# Altium PCB Interface.PcbDoc
Units mm, origin at the board's own origin, x right, y up, seen from the top; angles counter-clockwise.
Board outline 102.81 x 77.5 mm, 2 copper layers (Top Layer, Bottom Layer), stack 0.871 mm thick; 54 components, 47 nets, 231 pads, 116 vias.
Unrouted connection lines stored in the file: 1.
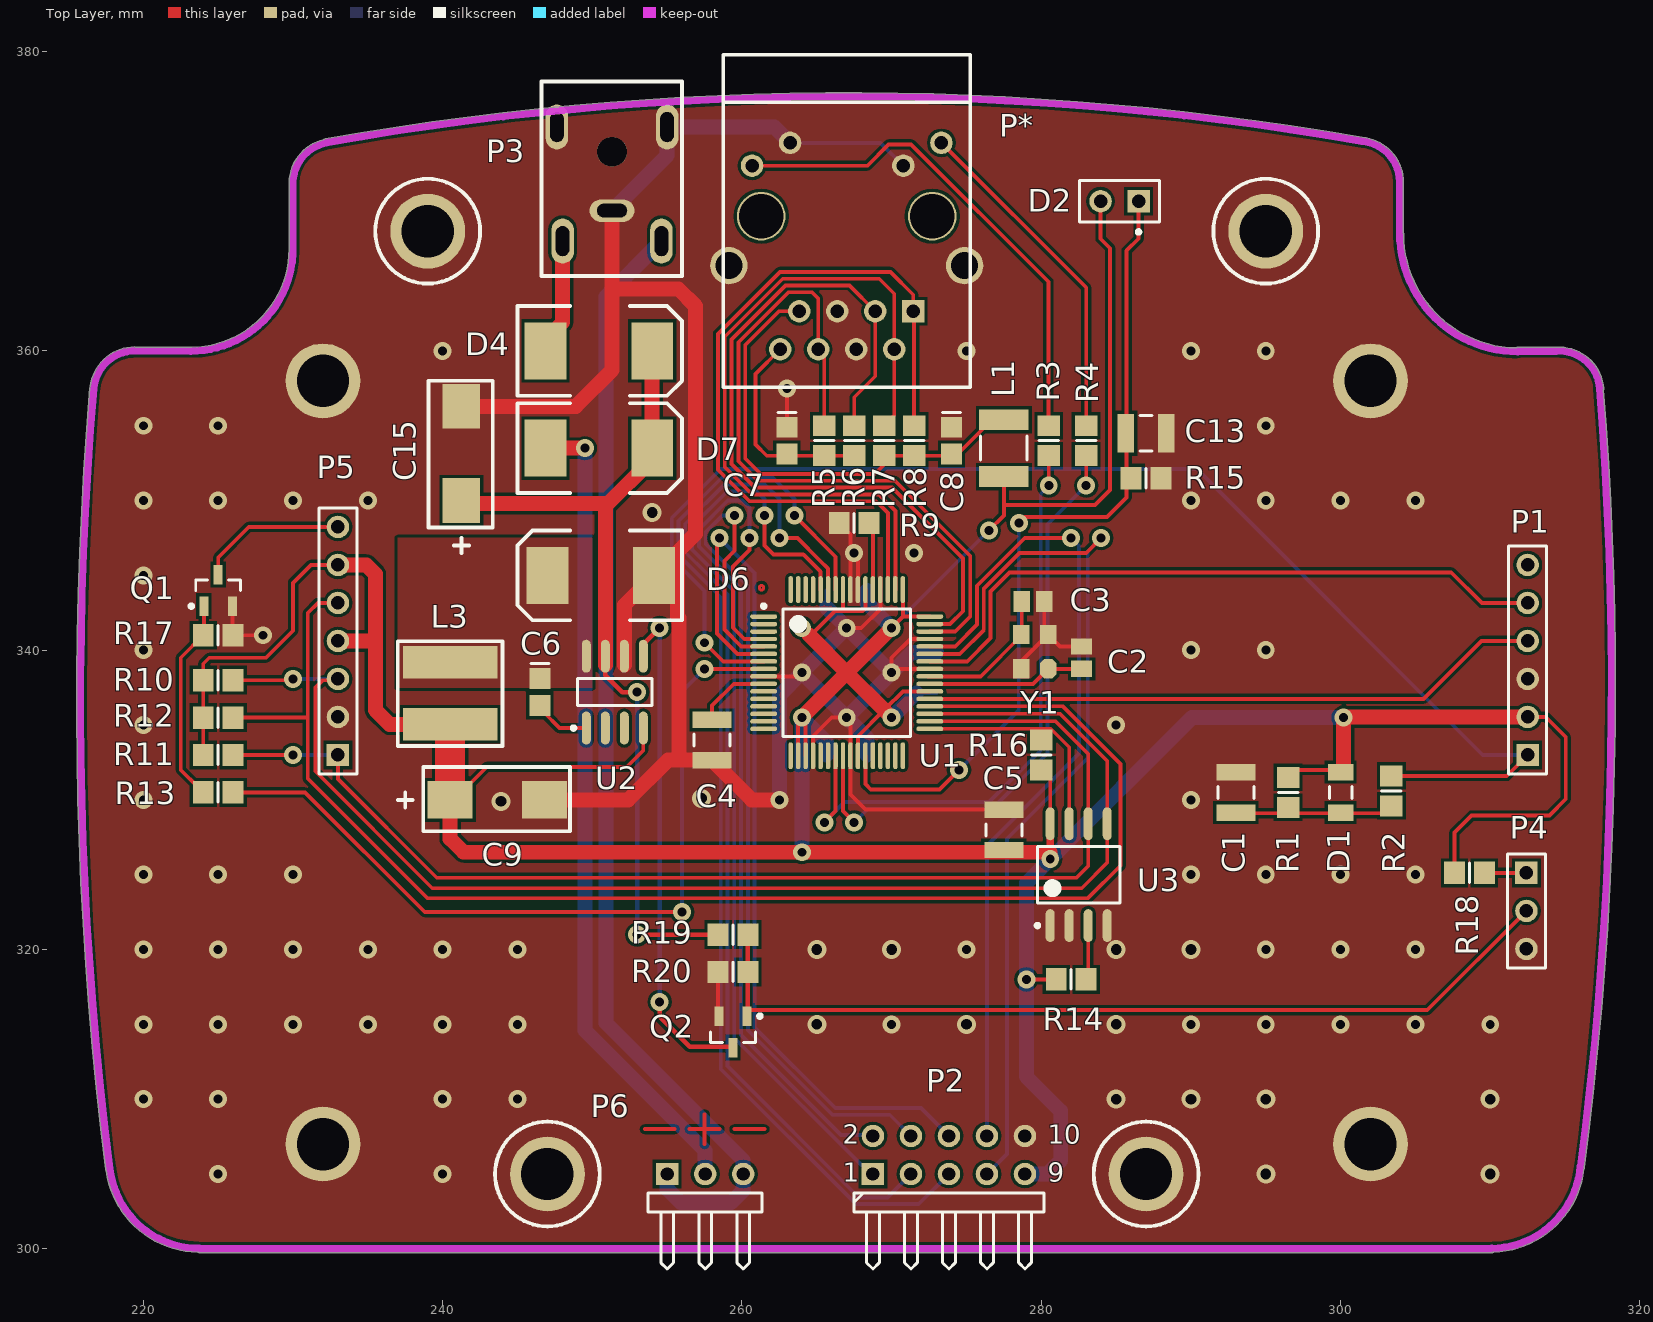
[diagram p0: Top Layer view]
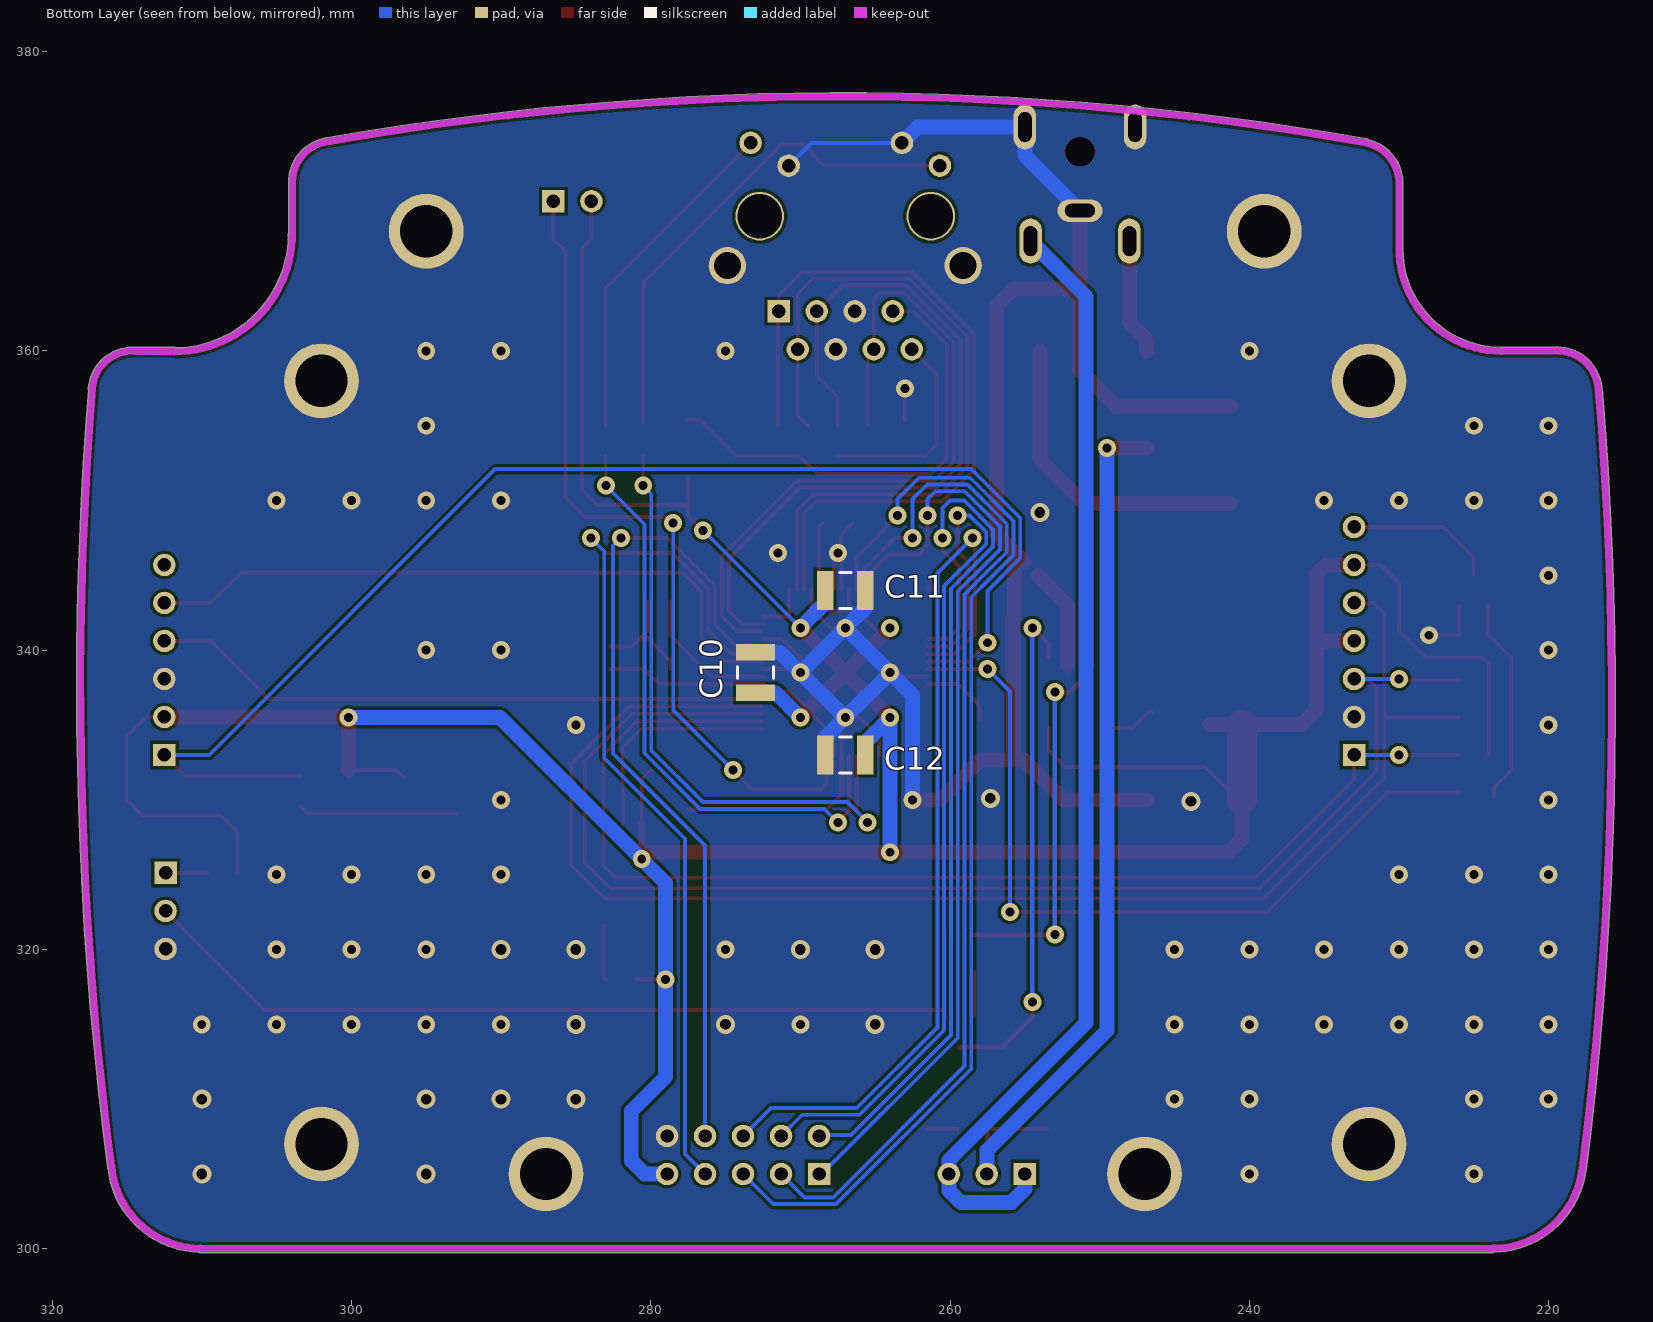
[diagram p1: Bottom Layer view, seen from below]

## Layer stack, top to bottom
Top Layer: signal copper 0.0356
Dielectric: core 0.8, FR-4, Dk 4.8
Bottom Layer: signal copper 0.0356

## Board outline
217.529,305.197 cw(c217.742,305.33) 217.493,305.299 cw(c465.792,336.49) 216.427,357.526 cw(c216.677,357.505) 216.455,357.621 cw(c219.418,357.279) 219.418,360.262 cw(c219.418,360.012) 219.495,360.25 223.164,360.25 cw(c223.164,360) 223.226,360.242 ccw(c223.164,366.82) 229.741,366.82 229.741,371.022 cw(c232.746,371.191) 232.047,374.118 cw(c232.196,373.917) 232.152,374.164 cw(c267.091,177.957) 301.447,374.267 cw(c301.19,371.268) 304.2,371.268 cw(c301.19,371.268) 304.195,371.096 cw(c303.95,371.043) 304.2,371.043 304.2,367.895 cw(c303.954,367.85) 304.205,367.85 ccw(c311.851,367.85) 311.721,360.204 cw(c311.851,359.99) 311.851,360.241 314.416,360.241 cw(c314.617,357.283) 317.575,357.493 cw(c317.325,357.475) 317.575,357.475 cw(c317.325,357.475) 317.565,357.403 cw(c68.107,337.495) 318.358,337.495 cw(c68.107,337.495) 316.297,305.445 cw(c316.049,305.477) 316.26,305.343 cw(c310.03,306.041) 310.221,299.775 cw(c310.112,300) 310.112,299.75 223.75,299.75 cw(c223.75,300) 223.636,299.777 cw(c223.741,306.045)

## Design rules (kind name [scope] priority, off if disabled: settings)
Clearance [All] p1: gap=0.2
PlaneClearance [All] p1: clearance=0.5
PlaneConnect [All] p1: planeconnectstyle=Direct reliefexpansion=0.508 reliefentries=4 reliefconductorwidth=0.254 reliefairgap=0.254
PolygonConnect [All] p1: connectstyle=Direct reliefconductorwidth=0.254 reliefentries=4 polygonreliefangle="90 Angle"
RoutingVias [All] p1: holewidth=0.711 width=1.27 viastyle="Through Hole" minholewidth=0.711 minwidth=1.27 maxholewidth=0.711 maxwidth=1.27
SMDNeckDown [All] p1: percent=200.000
SilkscreenOverComponentPads [All] p1: minsilkscreentomaskgap=0.254
SolderMaskExpansion [All] p1: expansion=0.102
Width [All] p1: maxlimit=2 minlimit=0.254 preferedwidth=0.254 checkconnectedcopper=TRUE
25 further rules are at their usual default settings.

## Components (designator, comment, footprint, x,y, rotation, side; value= is the part's Value field where it differs from the comment)
C1 "Cap" CAPC3225L 293,330.5 r270 top
C2 "Cap" CAPC2012L 282.7,339.5 r90 top
C3 "Cap" CAPC2012L 279.45,343.25 r180 top
C4 "Cap" CAPC3225L 258,334 r270 top
C5 "Cap" CAPC3225L 277.5,328 r90 top
C6 "Cap" CAPC2512L 246.5,337.2 r270 top
C7 "Cap" CAPC2512L 263,354 r270 top
C8 "Cap" CAPC2512L 274,354 r270 top
C9 "Cap Pol1" "Type D" 240,330 r0 top
C10 "Cap" CAPC3225L 273,338.5 r90 bottom
C11 "Cap" CAPC3225L 267,344 r180 bottom
C12 "Cap" CAPC3225L 267,333 r0 bottom
C13 "Cap" CAPC3225L 287,354.5 r0 top
C15 "Cap Pol1" "Type E" 241.25,349.5 r90 top
D1 "Diode" RESC3216L 300,330.5 r90 top
D2 "Photo Sen" PIN2 286.5,370 r180 top
D4 "Diode" "SMC WBODY" 254,360 r180 top
D6 "30BQ100" "SMC WBODY" 247,345 r0 top
D7 "Diode" "SMC WBODY" 254,353.5 r180 top
L1 "Inductor" INDC4532L 277.5,353.5 r90 top
L3 "Inductor" CDRH5D28NP 240.5,339.2 r270 top
P1 "Программатор" HDR1X6 312.5,333 r90 top
P2 "Header 5X2H" HDR2X5H 268.75,305 r0 top
P3 "PWR coneector" "PWR Con" 255,377.5 r270 top
P4 "power control" HDR1X3 312.42,325.12 r270 top
P5 "Display" HDR1X7 233,333 r90 top locked
P6 "Header 3H" HDR1X3H 255,305 r0 top
P* "J00-0063NL" EthernetCON 267,369 r90 top locked
Q1 "BSS123" SOT23_N 225,344 r90 top
Q2 "BSS123" SOT23_N 259.4,314.5 r270 top
R1 "Res2" RESC2012M 296.5,330.5 r90 top
R2 "Res2" RESC2012M 303.4,330.6 r270 top
R3 "Res2" RESC2012M 280.5,354 r90 top
R4 "Res2" RESC2012M 283,354 r90 top
R5 "Res2" RESC2012M 265.5,354 r90 top
R6 "Res2" RESC2012M 267.5,354 r90 top
R7 "Res2" RESC2012M 269.5,354 r90 top
R8 "Res2" RESC2012M 271.5,354 r90 top
R9 "Res2" RESC2012M 267.5,348.5 r0 top
R10 "Res2" RESC2012M 225,338 r0 top
R11 "Res2" RESC2012M 225,333 r0 top
R12 "Res2" RESC2012M 225,335.5 r180 top
R13 "Res2" RESC2012M 225,330.5 r180 top
R14 "Res2" RESC2012M 282,318 r0 top
R15 "Res2" RESC2012M 287,351.5 r180 top
R16 "Res2" RESC2012M 280,333 r90 top
R17 "Res2" RESC2012M 225,341 r0 top
R18 "Res2" RESC2012M 308.61,325.12 r0 top
R19 "Res2" RESC2012M 259.4,321 r0 top
R20 "Res2" RESC2012M 259.4,318.5 r180 top
U1 "PIC18F66J60-I/PT" TQFP-PT64_N 267,338.5 r0 top locked
U2 "LM2674M-3.3" M08A_N 251.5,337.2 r90 top
U3 "24FC1025T-I/SM" SOIJ-SM8_N 282.5,325 r90 top
Y1 "Кварцевый резонатор" "HC 49SM" 280.45,338.75 r90 top

## Footprints (in the part's own frame and the unit in brackets; to place one, negate y for a bottom-side part, rotate by r counter-clockwise, add the part's x,y. Pads: shape width x height; smd on the part's side, far side on the other; paste and mask are expansions set on the pad)
CAPC2012L [mm] "Chip Capacitor, Body 2.0x1.3mm, IPC High Density"
  rect 1.1x1.4 smd: 1(-0.75,0) 2(0.75,0)
  body extent -1.1,-0.72 1.1,0.72, height 1.4
CAPC2512L [mm] "Chip Capacitor, Body 2.54x1.27mm, IPC High Density"
  rect 1.4x1.4 smd: 1(-0.9,0) 2(0.9,0)
  silkscreen extent -1.9,-0.6 -1.9,0.6, body extent -1.45,-0.82 1.45,0.82, height 1.3
CAPC3225L [mm] "Chip Capacitor, Body 3.2x2.5mm, IPC High Density"
  rect 1.1x2.6 smd: 1(-1.35,0) 2(1.35,0)
  silkscreen extent -0.4,-1.2 0.4,1.2, body extent -1.7,-1.35 1.7,1.35, height 1.5
CDRH5D28NP [mm] "POWER INDUCTORS <SMD Type: CDRH Series>"
  rect 2.15x6.3 smd: 1(0,0) 2(4.15,0)
  silkscreen extent -1.4,-3.5 5.6,3.5, body extent -0.82,-2.9 4.97,2.91, height 3
EthernetCON [mm] "Ethernet connector w/two LEDs"
  rect 1.5x1.5 hole 0.9: 1(-6.35,-4.445)
  round 1.5 hole 0.9: 2(-8.89,-3.175) 3(-6.35,-1.905) 4(-8.89,-0.635) 5(-6.35,0.635) 6(-8.89,1.905) 7(-6.35,3.175) 8(-8.89,4.445) 9(4.902,-6.325) 10(3.378,-3.785) 11(4.902,3.785) 12(3.378,6.325)
  round 2.5 hole 1.8: 13(-3.302,-7.874) 14(-3.302,7.874)
  round 3.25 hole 3 unplated: 15(0,-5.715) 16(0,5.715)
  silkscreen extent -11.43,-8.25 10.79,8.25, body extent -11.43,-8.25 11,8.25, height 13.97
"HC 49SM" [mm] "Кварцевый резонатор"
  oct 1.3x1.1 smd: 1(0,0)
  rect 1.3x1.1 smd: 2(2.3,0) 3(2.3,1.8) 4(0,1.8)
  body extent -0.45,-0.38 2.75,2.12, height 1.2
HDR1X3 [mm] "Connector; Header; 3 Position"
  rect 1.5x1.5 hole 0.9: 1(0,0)
  round 1.5 hole 0.9: 2(2.54,0) 3(5.08,0)
  silkscreen extent -1.27,-1.27 6.35,1.27
HDR1X3H [mm] "Connector; Header; 3 Position; Right Angle"
  rect 1.5x1.5 hole 0.9: 1(0,0)
  round 1.5 hole 0.9: 2(2.54,0) 3(5.08,0)
  silkscreen extent -1.27,-6.35 6.35,-1.27
HDR1X6 [mm] "Connector; Header; 6 Position"
  rect 1.5x1.5 hole 0.9: 1(0,0)
  round 1.5 hole 0.9: 2(2.54,0) 3(5.08,0) 4(7.62,0) 5(10.16,0) 6(12.7,0)
  silkscreen extent -1.27,-1.27 13.97,1.27
HDR1X7 [mm] "Connector; Header; 7 Position"
  rect 1.5x1.5 hole 0.9: 1(0,0)
  round 1.5 hole 0.9: 2(2.54,0) 3(5.08,0) 4(7.62,0) 5(10.16,0) 6(12.7,0) 7(15.24,0)
  silkscreen extent -1.27,-1.27 16.51,1.27
HDR2X5H [mm] "Connector; Header; 5x2 Position; Right Angle"
  rect 1.5x1.5 hole 0.9: 1(0,0)
  round 1.5 hole 0.9: 2(0,2.54) 3(2.54,0) 4(2.54,2.54) 5(5.08,0) 6(5.08,2.54) 7(7.62,0) 8(7.62,2.54) 9(10.16,0) 10(10.16,2.54)
  silkscreen extent -1.27,-6.35 11.43,-1.27
INDC4532L [mm] "Chip Inductor, Body 4.5x3.2mm, IPC High Density"
  rect 1.4x3.3 smd: 1(-1.9,0) 2(1.9,0)
  silkscreen extent -0.8,-1.55 0.8,1.55, body extent -2.4,-1.7 2.4,1.7, height 0.55
M08A_N [mm] "SOIC, 8-Leads, Body 4.9x3.9mm, Pitch 1.27mm, IPC Medium Density"
  oval 2.2x0.6 smd: 1(-2.4,1.905) 2(-2.4,0.635) 3(-2.4,-0.635) 4(-2.4,-1.905) 5(2.4,-1.905) 6(2.4,-0.635) 7(2.4,0.635) 8(2.4,1.905)
  silkscreen extent -2.52,-2.5 0.9,2.88, body extent -2,-2.5 2,2.5, height 1.75
PIN2 [mm] "Photosensitive Diode; 2 Leads"
  rect 1.5x1.5 hole 0.9: 1(0,0)
  round 1.5 hole 0.9: 2(2.54,0)
  silkscreen extent -1.4,-1.4 3.94,2.17
"PWR Con" [mm] "Connector"
  oval 1.5x3 hole 0.9 slot 2 at 90 deg: 1(8.128,-3.683)
  oval 3x1.5 hole 0.9 slot 2 at 0 deg: 2(10.16,-0.381) 3(10.16,-6.985) 4_1(2.54,-7.366) 5(2.54,0)
  round 2 hole 2: 4(4.191,-3.683)
  silkscreen extent -0.5,-8.4 12.5,1, body extent 0,-7.37 12,0, height 10
RESC2012M [mm] "Chip Resistor, Body 2.0x1.2mm, IPC Low Density"
  rect 1.4x1.5 smd: 1(-1,0) 2(1,0)
  silkscreen extent 0,-0.65 0,0.65, body extent -1.07,-0.7 1.07,0.7, height 0.7
RESC3216L [mm] "Chip Resistor, Body 3.1x1.6mm, IPC High Density"
  rect 1.1x1.7 smd: 1(-1.35,0) 2(1.35,0)
  silkscreen extent -0.4,-0.75 0.4,0.75, body extent -1.68,-0.87 1.68,0.87, height 2.54
"SMC WBODY" [mil]
  rect 110x150 smd: 1(280.51,0) 2(0,0)
  silkscreen extent -79,-118 354,118, body extent 0,-118 276,118, height 84
SOIJ-SM8_N [mm] "SOP, 8-Leads, Body 5.2x5.2mm, Pitch 1.27mm, IPC Medium Density"
  oval 2.2x0.6 smd: 1(-3.4,1.905) 2(-3.4,0.635) 3(-3.4,-0.635) 4(-3.4,-1.905) 5(3.4,-1.905) 6(3.4,-0.635) 7(3.4,0.635) 8(3.4,1.905)
  silkscreen extent -3.52,-2.75 1.9,2.88, body extent -2.73,-2.75 2.73,2.75, height 2.04
SOT23_N [mm] "SOT23, 3-Leads, Body 2.9x1.3mm, Pitch 0.95mm, Lead Span 2.3mm, IPC Medium Density"
  rect 1.3x0.6 smd: 1(-1.05,0.95) 2(-1.05,-0.95) 3(1.05,0)
  silkscreen extent -1.17,-1.5 0.7,1.92, body extent -0.7,-1.5 0.7,1.5, height 1.1
TQFP-PT64_N [mm] "Thin QFP, 64-Leads, Body 10x10mm, Pitch 0.5mm, IPC Medium Density"
  oval 1.8x0.3 smd: 1(-5.55,3.75) 2(-5.55,3.25) 3(-5.55,2.75) 4(-5.55,2.25) 5(-5.55,1.75) 6(-5.55,1.25) 7(-5.55,0.75) 8(-5.55,0.25) 9(-5.55,-0.25) 10(-5.55,-0.75) 11(-5.55,-1.25) 12(-5.55,-1.75) 13(-5.55,-2.25) 14(-5.55,-2.75) 15(-5.55,-3.25) 16(-5.55,-3.75) 33(5.55,-3.75) 34(5.55,-3.25) 35(5.55,-2.75) 36(5.55,-2.25) 37(5.55,-1.75) 38(5.55,-1.25) 39(5.55,-0.75) 40(5.55,-0.25) 41(5.55,0.25) 42(5.55,0.75) 43(5.55,1.25) 44(5.55,1.75) 45(5.55,2.25) 46(5.55,2.75) 47(5.55,3.25) 48(5.55,3.75)
  oval 0.3x1.8 smd: 17(-3.75,-5.55) 18(-3.25,-5.55) 19(-2.75,-5.55) 20(-2.25,-5.55) 21(-1.75,-5.55) 22(-1.25,-5.55) 23(-0.75,-5.55) 24(-0.25,-5.55) 25(0.25,-5.55) 26(0.75,-5.55) 27(1.25,-5.55) 28(1.75,-5.55) 29(2.25,-5.55) 30(2.75,-5.55) 31(3.25,-5.55) 32(3.75,-5.55) 49(3.75,5.55) 50(3.25,5.55) 51(2.75,5.55) 52(2.25,5.55) 53(1.75,5.55) 54(1.25,5.55) 55(0.75,5.55) 56(0.25,5.55) 57(-0.25,5.55) 58(-0.75,5.55) 59(-1.25,5.55) 60(-1.75,5.55) 61(-2.25,5.55) 62(-2.75,5.55) 63(-3.25,5.55) 64(-3.75,5.55)
  silkscreen extent -5.67,-4.25 4.25,4.57, body extent -5,-5 5,5, height 1.2
"Type D" [mm] "Tantal capacitor Type D"
  rect 3x2.5 smd: 1(0.5,0) 2(6.8,0)
  silkscreen extent -3,-2.1 8.5,2.2, body extent 0,-2.15 7.3,2.15, height 2.8
"Type E" [mm] "Tantal capacitor"
  rect 3x2.5 smd: 1(0.5,0) 2(6.8,0)
  silkscreen extent -3,-2.1 8.5,2.2, body extent 0,-2.15 7.3,2.15, height 4

## Part data
C1 C2 C3 C4 C5 C6 C7 C8 C10 C11 C12 C13: "Capacitor"
C9 C15: "Polarized Capacitor (Radial)"
D1 D4 D7: "Default Diode"
D2: "Photosensitive Diode"
D6: "Schottky Rectifier"
P1: library part "Header 6", "Header, 6-Pin"
P2: "Header, 5-Pin, Dual row, Right Angle"
P4: library part "Header 3", "ON/off(1/0)"
P5: library part "Header 7", "Header, 7-Pin"
P6: "Header, 3-Pin, Right Angle"
Q1 Q2: "N-channel Enhancement Mode Vertical D-MOSFET"
R1 R2 R3 R4 R5 R6 R7 R8 R9 R10 R11 R12 R13 R14 R15 R16 R17 R18 R19 R20: "Resistor"
U1: "High Performance, 1-Mbit Flash Microcontroller with Ethernet, 64K Flash, 64-Pin TQFP, Industrial Temperature Range"
U2: "SIMPLE SWITCHER; Power Converter High Efficiency 500mA Step-Down Voltage Regulator"
U3: "1 Mbit, 1MHz, 2.5V, I2C Serial EEPROM, 8-Pin SOIC 208mil, Industrial Temperature, Tape and Reel"
Y1: library part XTAL

## Free pads (board coordinates)
  round 5 hole 3.5: 0(232,307) 0(232,358) 0(239,368) 0(247,305) 0(287,305) 0(295,368) 0(302,307) 0(302,358)

## Via types
v1: diameter 1.2, hole 0.6, Top Layer to Bottom Layer, 100 vias
v2: diameter 1.27, hole 0.711, Top Layer to Bottom Layer, 16 vias

## Nets (pads, with @x,y where several pads share a name; then routed paths per layer and width w, separated by ;. In a path a pad name is that pad's centre, name@x,y a point inside that pad or via, vN(x,y) a via of type N, cw(c..) or ccw(c..) an arc to the next point about the centre after c; other vN are vias at no path point)
GND: C1.1 C2.2 C3.1 C4.2 C5.2 C7.1 C8.1 C9.2 C10.2 C11.2 C12.2 C13.2 C15.2 D6.1 P1.3 P2.10 P3.1 P3.4 P3.4_1 P3.5 P4.3 P5.2 P*.4 P*.5 P*.10 P*.11 P*.13 P*.14 pad.0 Q1.2 Q2.2 R9.1 R15.1 R17.2 R20.2 U1.9 U1.20 U1.25 U1.41 U1.45 U1.52 U1.55 U1.56 U2.6 U3.1 U3.2 U3.4 Y1.2 Y1.4 | length 203.3
  Top Layer w0.254: Q1.2 225.95,341.05 R17.2 v1(228,341) ; R20.2 258.4,315.6 Q2.2 ; U1.9 263.75,338.25 v1(264,338.5) ; C7.1@263,355.35 v1(263,357.5) ; U1.20 264.75,334.25 266,335.5 v1(267,335.5) 267.25,335.25 U1.25 267.25,330.35 268.25,329.35 273.15,329.35 C5.2 ; R9.1 267.25,347.75 U1.56 ; v1@267.25,341.475 267.975,341.475 269.25,342.75 U1.52 ; v1(267.5,346.5) 267.75,346.25 U1.55 ; P*.4@267.635,359.985 P*.4 ; U1.41 270.25,338.75 v1(270,338.5) 270,339.5 271.25,340.75 U1.45 ; Y1.4 278.65,339.25 Y1.2 ; C3.1 280.2,341.3 Y1.2 ; C2.2 281.25,340.25 Y1.2
  Top Layer w1: C15.2 248.9,356.3 251.317,358.717 251.317,364.15 ; C9.2 252.4,330 255,332.6 ; 251.317,365.817 251.317,364.15 ; P3.1 251.317,364.15 ; U2.6@252.135,339 252.135,343.01 D6.1 ; 255.05,332.65 255.699,332.65 ; D6.1@255.05,345.925 255.699,346.574 ; v1(262.5,330) 260.65,330 C4.2 255.699,332.65 ; 251.317,364.15 255.75,364.15 256.9,363 256.9,347.775 255.699,346.574 ; 255.699,332.65 255.8,332.751 255.8,342.139 255.699,342.24 255.699,346.574
  Bottom Layer w0.254: P*.11 269.261,373.902 P*.10 ; C11.2@265.65,342.85 C11.2
  Bottom Layer w1: P3.1 255,373.055 P3.5 262.158,374.96 P*.11 ; v1(262.5,330) 262.5,337 v1(264,338.5) ; C11.2@265.65,342.85 v1(267,341.5) ; C12.2 268.35,334.15 v1(267,335.5) ; C10.2 271.35,339.85 v1(270,338.5) ; v1(264,338.5) v1(267,341.5) ; v1(264,338.5) v1(267,335.5) ; v1(267,335.5) v1(270,338.5) ; v1(267,341.5) v1(270,338.5)
  other v1: 225,305 240,305 220,310 225,310 240,310 245,310 220,315 225,315 230,315 235,315 240,315 245,315 270,315 290,315 295,315 300,315 305,315 310,315 220,320 225,320 230,320 235,320 240,320 245,320 275,320 295,320 300,320 305,320 220,325 225,325 230,325 290,325 295,325 300,325 305,325 220,330 290,330 220,335 285,335 220,340 290,340 295,340 220,345 271.5,346.5 220,350 225,350 230,350 235,350 290,350 295,350 300,350 305,350 220,355 225,355 295,355 240,360 275,360 290,360 295,360
  other v2: 295,305 310,305 285,310 290,310 295,310 310,310 265,315 275,315 285,315 265,320 270,320 285,320 290,320 243.9,329.9 257.3,330.1 254,349.2
NetC1_2: C1.2 D1.1 R1.1 R2.2 | length 10.6
  Top Layer w0.254: C1.2@293,329.1 297.4,329.1 302.9,329.1 R2.2
NetC2_1: C2.1 U1.39 Y1.1 | length 10.7
  Top Layer w0.254: U1.39@272.45,337.75 279.45,337.75 Y1.1 C2.1
NetC3_2: C3.2 U1.40 Y1.3 | length 9.6
  Top Layer w0.254: U1.40@272.45,338.25 275.95,338.25 Y1.3@278.7,341 ; Y1.3 278.7,341.1 C3.2
NetC4_1: C4.1 U1.10 | length 5
  Top Layer w0.254: C4.1 258,336.3 259.45,337.75 U1.10
NetC6_1: C6.1 D6.2 L3.1 U2.8
NetC6_2: C6.2 U2.1 | length 3.5
  Top Layer w0.254: C6.2@246.5,335.85 246.75,335.85 247.8,334.8 U2.1
NetC7_2: C7.2 P*.8 R5.1 R6.1 | length 14
  Top Layer w0.254: P*.8 260.897,358.452 260.897,353.753 261.65,353 R6.1
NetC8_2: C8.2 L1.2 P*.7 R7.1 R8.1 | length 31.3
  Top Layer w0.254: P*.7 262.478,362.65 260.216,360.388 260.216,352.812 261.254,351.774 268.874,351.774 270.1,353 C8.2@274.313,353 ; C8.2@274.313,353.013 276.7,355.4 L1.2
NetC13_1: C13.1 D2.1 R15.2 U1.27 | length 55
  Top Layer w0.254: U1.27 268.25,331.05 268.6,330.7 273.2,330.7 v1(274.5,332) ; v1(278.5,348.5) 278.9,348.9 284.4,348.9 285.7,350.2 285.7,366.7 286.5,367.5 D2.1
  Bottom Layer w0.254: v1(274.5,332) 278.5,336 v1(278.5,348.5)
NetC15_1: C15.1 D4.2 D7.2 R19.1 U2.7 | length 57.4
  Top Layer w0.3: U2.7 250.865,338.335 252,337.2 v1(253,337.2) ; v1(253,321) R19.1
  Top Layer w1: C15.1@241.25,349.8 250.865,349.8 ; U2.7@250.865,339 250.865,349.615 254,352.75 D4.2
  Bottom Layer w0.3: v1(253,321) v1(253,337.2)
NetD4_1: D4.1 P3.3 | length 7.8
  Top Layer w1: D4.1 246.875,360.775 248.015,361.915 P3.3
NetD7_1: D7.1 P6.2 | length 54.5
  Top Layer w1: D7.1 v1(249.5,353.5)
  Bottom Layer w1: v1(249.5,353.5) 249.5,314.6 257.54,306.56 P6.2
NetP1_1: P1.1 R2.1 U1.7 | length 90.6
  Top Layer w0.254: v1(257.499,340.499) 257.5,340.2 257.8,340.2 258.75,339.25 U1.7 ; R2.1@304,331.6 R2.1 303.7,331.6 311.1,331.6 P1.1
  Bottom Layer w0.254: v1(257.499,340.499) 257.5,343.965 255.303,346.162 255.303,348.824 258.579,352.1 276.44,352.1 290.4,352.1 309.5,333 P1.1
NetP1_4: P1.4 U1.37 | length 41.6
  Top Layer w0.254: U1.37 303.31,336.75 303.955,336.75 304.69,336.75 305.55,336.75 309.42,340.62 P1.4
NetP1_5: P1.5 U1.42 | length 45.1
  Top Layer w0.254: U1.42 275.05,339.25 276.616,340.816 276.616,343.932 277.884,345.2 307.4,345.2 309.44,343.16 P1.5
NetP2_1: P2.1 U1.60 | length 63.2
  Top Layer w0.254: v1(261.5,349) 261.5,347 262.1,346.4 264.1,346.4 265.25,345.25 U1.60
  Bottom Layer w0.254: v1(261.5,349) 261.5,350.1 260.98,350.62 259.025,350.62 256.665,348.26 256.665,346.74 257.74,345.665 259.484,343.921 259.484,314.096 268.58,305 P2.1
NetP2_2: P2.2 U1.4 | length 62
  Top Layer w0.254: v1(260.5,347.5) 260.5,347 260.5,346.7 259.4,345.6 259.4,341.5 260.15,340.75 U1.4
  Bottom Layer w0.254: v1(260.5,347.5) 260.5,349.5 260,350 259.047,350 257.119,348.072 257.119,346.928 257.928,346.119 259.938,344.109 259.938,314.42 259.938,314.284 266.622,307.6 P2.2@269,307.6
NetP2_3: P2.3 U1.59 | length 69.8
  Top Layer w0.254: v1(262.5,347.5) 263.7,347.5 265.2,346 265.75,345.45 U1.59
  Bottom Layer w0.254: v1(262.5,347.5) 262.5,350.1 261.526,351.074 258.837,351.074 256.211,348.448 256.211,346.552 257.552,345.211 259.03,343.733 259.03,313.908 259.03,312.212 267.802,303.44 269.73,303.44 P2.3
NetP2_4: P2.4 U1.5 | length 61.7
  Top Layer w0.254: v1(259.5,349) 259.5,346.642 258.826,345.968 258.826,341.374 259.95,340.25 U1.5
  Bottom Layer w0.254: v1(259.5,349) 258.689,349 257.573,347.884 257.573,347.116 258.116,346.573 260.392,344.297 260.392,314.608 266.04,308.96 269.87,308.96 P2.4
NetP2_5: P2.5 U1.58 | length 75.1
  Top Layer w0.254: U1.58 266.25,346.25 v1(263.5,349) ; v1(263.5,349) 263.5,348.6 v1(263.5,349)
  Bottom Layer w0.254: v1(263.5,349) 263.5,350.1 262.072,351.528 261.657,351.528 261.243,351.528 258.649,351.528 255.757,348.636 255.757,346.364 257.364,344.757 258.576,343.545 258.576,312.024 267.614,302.986 271.816,302.986 P2.5
NetP2_6: P2.6 U1.6 | length 59.8
  Top Layer w0.254: v1(258.5,347.5) 258.332,347.332 258.332,341.121 259.703,339.75 U1.6
  Bottom Layer w0.254: v1(258.5,347.5) 260.846,345.154 260.846,314.796 266.228,309.414 271.956,309.414 P2.6
NetP2_7: P2.7 U1.43 | length 61.9
  Top Layer w0.254: U1.43 274.55,339.75 276.162,341.362 276.162,344.12 278.542,346.5 283,346.5 v1(284,347.5)
  Bottom Layer w0.254: P2.7 277.7,306.33 277.7,327.4 283.1,332.8 283.1,346.6 v1(284,347.5)
NetP2_8: P2.8 U1.44 | length 56.7
  Top Layer w0.254: U1.44 274.25,340.25 275.708,341.708 275.708,344.308 278.899,347.499 v1(282,347.499)
  Bottom Layer w0.254: P2.8 276.37,326.955 282.519,333.104 282.519,346.981 v1(282,347.499)
NetP3_2: P3.2 P6.1 P6.3 | length 75.6
  Bottom Layer w1: P3.2 250.9,363.621 250.9,315.1 260.08,305.92 260.08,303.9 259.28,303.1 255.9,303.1 255,304 P6.1
NetP4_1: P4.1 R18.2 | length 2.8
  Top Layer w0.254: R18.2 P4.1
NetP4_2: P4.2 Q2.1 R19.2 R20.1 | length 65.4
  Top Layer w0.254: Q2.1 260.35,320.95 R19.2 260.4,315.95 284.175,315.95 305.79,315.95 P4.2
  Top Layer w0.3: Q2.1 Q2.1@260.4,315.6
NetP5_1: P5.1 R11.2 U1.34 U3.6 | length 80.8
  Top Layer w0.254: R11.2 v1(230,333) ; P5.1 233,331.4 239.6,324.8 282.358,324.8 283.135,325.577 U3.6 283.135,333.065 280.95,335.25 U1.34
  Bottom Layer w0.254: v1(230,333) P5.1
NetP5_3: P5.3 R10.2 U1.35 U3.5 | length 91.2
  Top Layer w0.254: R10.2 v1@230,338 ; P5.3@233.08,338 232,338 231.5,337.5 231.5,331.908 239.308,324.1 282.7,324.1 284.405,325.805 284.405,332.595 281.25,335.75 U1.35
  Bottom Layer w0.254: v1(230,338.08) P5.3
NetP5_5: P5.5 R12.1 U1.36 | length 98
  Top Layer w0.254: R12.1 230.928,335.5 ; P5.5 231.66,343.16 230.981,342.481 230.981,331.419 238.968,323.432 283.132,323.432 285.3,325.6 285.3,332.4 281.45,336.25 U1.36
NetP5_7: P5.7 Q1.3 | length 10
  Top Layer w0.254: Q1.3 225,346.2 227.04,348.24 P5.7
NetP*_9: P*.9 R4.2 | length 22.9
  Top Layer w0.254: P*.9 283,364.227 R4.2
NetP*_12: P*.12 R3.2 | length 33.6
  Top Layer w0.254: P*.12 268.378,372.378 269.8,373.8 271.3,373.8 280.475,364.625 R3.2@280.475,355.2
NetQ1_1: Q1.1 R13.2 R17.1 | length 13.9
  Top Layer w0.254: R13.2@223.65,330.15 223.65,330.85 222.5,332 222.5,339.5 224.05,341.05 Q1.1
NetQ2_3: Q2.3 U2.5 | length 34.1
  Top Layer w0.3: U2.5 253.405,340.405 v1(254.5,341.5) ; v1(254.5,316.5) 254.5,315.5 256.5,313.5 259.25,313.5 259.35,313.4 Q2.3
  Bottom Layer w0.3: v1(254.5,316.5) v1(254.5,341.5)
NetR3_1: R3.1 U1.23 | length 41.1
  Top Layer w0.254: v1(265.5,328.5) 266.25,329.25 U1.23 ; v1(280.5,351) R3.1
  Bottom Layer w0.254: v1(265.5,328.5) 266.854,329.854 276.512,329.854 279.96,333.302 279.96,350.46 v1(280.5,351)
NetR4_1: R4.1 U1.24 | length 40.5
  Top Layer w0.254: U1.24 266.75,329.25 v1(267.5,328.5) ; v1(283,351) R4.1
  Bottom Layer w0.254: v1(267.5,328.5) 268.4,329.4 276.7,329.4 280.414,333.114 280.414,348.414 v1(283,351)
NetR13_1: R13.1 U1.8 | length 54.1
  Top Layer w0.254: R13.1 230.8,330.5 238.8,322.5 v1(256,322.5) ; v1(257.5,338.75) U1.8
  Bottom Layer w0.254: v1(256,322.5) 256,337.25 v1(257.5,338.75)
NetR14_2: R14.2 U3.3 | length 3.7
  Top Layer w0.254: R14.2 283.135,318.135 U3.3
NetR16_2: R16.2 U1.33 U3.7 | length 14.9
  Top Layer w0.254: U1.33 280.637,334.75 281.865,333.522 U3.7
NetU1_11: U1.11
RBIAS: R9.2 U1.53 | length 4.6
  Top Layer w0.254: R9.2 268.75,348.25 U1.53
TP_IN_N: P*.6 R5.2 U1.46 | length 48.8
  Top Layer w0.254: R5.2 265.5,359.705 P*.6 265.095,363.505 264.682,363.918 263.104,363.918 259.762,360.576 259.762,352.624 261.066,351.32 270.222,351.32 275.254,346.288 275.254,342.254 274.25,341.25 U1.46
TP_IN_P: P*.3 R6.2 U1.47 | length 52.6
  Top Layer w0.254: R6.2 267.5,356.9 268.905,358.305 P*.3 267.183,364.372 262.916,364.372 259.308,360.764 259.308,352.436 260.878,350.866 270.034,350.866 274.76,346.14 274.76,342.607 273.903,341.75 U1.47@272.45,341.75
TPOUT1_N: P*.2 R7.2 U1.50 | length 49
  Top Layer w0.254: R7.2 270.175,355.675 P*.2 270.175,363.825 269.174,364.826 262.728,364.826 258.854,360.952 258.854,352.248 260.69,350.412 269.142,350.412 270.25,349.304 U1.50
TPOUT1_P: P*.1 R8.2 U1.51 | length 50.9
  Top Layer w0.254: U1.51 269.75,349.162 268.954,349.958 260.502,349.958 258.4,352.06 258.4,361.14 262.54,365.28 269.92,365.28 271.445,363.755 P*.1 271.5,362.595 R8.2
VCC: C5.1 C9.1 C10.1 C11.1 C12.1 D1.2 D2.2 L1.1 L3.2 P1.2 P2.9 P5.4 P5.6 R1.2 R10.1 R11.1 R12.2 R14.1 R16.1 R18.1 U1.18 U1.19 U1.26 U1.38 U1.48 U1.49 U1.54 U1.57 U2.4 U3.8 | length 303.4
  Top Layer w0.2: 261.454,344.175 ccw(c261.304,344.175) 261.454,344.175
  Top Layer w0.254: R11.1 224,339.1 224.4,339.5 228.2,339.5 230,341.3 230,344.5 231.2,345.7 P5.6 ; 235.48,340.62 235.5,340.6 ; C9.1@240.5,329.75 242.95,332.2 252.3,332.2 253.405,333.305 U2.4 ; U1.18 263.75,335.25 v1(264,335.5) 264.25,335.25 U1.19 ; v1(264,341.5) 264.489,341.011 264.611,341.011 266.225,342.625 266.75,342.625 ; U1.57 266.75,342.625 ; U1.26 267.75,334.25 269.5,336 v1(270,335.5) 269.6,335.9 269.6,336.1 270.75,337.25 U1.38 ; U1.54 268.25,342.8 268.075,342.625 266.75,342.625 ; v1@269.525,341.5 v1@269.8,341.5 ; v1@269.8,341.3 v1@269.8,341.5 ; U1.49 270.75,342.25 ; U1.48 270.75,342.25 ; v1(276.493,347.993) 277.5,349 277.5,349.699 ; L1.1 277.5,349.699 ; v1(279,318) R14.1 ; R16.1 280.595,331.405 U3.8 ; D2.2 283.96,367.5 284.6,366.86 284.6,350.7 283.599,349.699 277.5,349.699 ; R1.2 297,332 D1.2@300.6,332 ; R18.1 307.61,327.81 308.75,328.95 313.95,328.95 315.05,330.05 315.05,334.2 313.71,335.54 P1.2 ; v1@269.8,341.5 v1(270,341.5) 270.75,342.25
  Top Layer w0.5: U3.8 280.598,326.477 v1(280.599,326.034)
  Top Layer w1: P5.4 235.48,340.62 ; P5.6 234.9,345.7 235.5,345.1 235.5,336 236.45,335.05 L3.2@242.65,335.05 ; C9.1@240.5,329.75 240.5,327.4 241.4,326.5 v1(264,326.5) 280.576,326.5 280.598,326.477 280.6,326.476 v1(280.599,326.034) ; v1(264,335.5) 267,338.5 ; 264.489,341.011 267,338.5 ; v1@269.6,335.9 269.5,336 267,338.5 ; v1@269.8,341.3 267,338.5 ; D1.2@300.2,332 v1(300.2,335.5) 300.2,335.54 P1.2
  Top Layer w2: C9.1 L3.2
  Bottom Layer w0.254: v1(270,341.5) v1(276.493,347.993) ; 271.65,337.15 C10.1
  Bottom Layer w1: v1(264,326.5) v1(264,335.5) 265.65,333.85 C12.1 ; C11.1 268.35,343.15 v1(270,341.5) ; v1(270,335.5) 271.65,337.15 ; P2.9 280.4,305 281.3,305.9 281.3,309.2 279,311.5 v1(279,318) 279,324.435 v1(280.599,326.034) 290.065,335.5 v1(300.2,335.5)
pads on no net: P1.6 P*.15 P*.16 U1.1 U1.2 U1.3 U1.12 U1.13 U1.14 U1.15 U1.16 U1.17 U1.21 U1.22 U1.28 U1.29 U1.30 U1.31 U1.32 U1.61 U1.62 U1.63 U1.64 U2.2 U2.3
copper on no net: | length 8
  Top Layer w0.25: 253.5,308 255.5,308 ; 256.5,308 258.5,308 ; 257.5,307 257.5,309 ; 259.5,308 261.5,308

## Polygon pours and split planes (outlines as drawn)
NetC6_1 on Top Layer "Top Layer-No Net" (solid, remove dead copper, pour order 1000): 250,337.5 250,347.5 237,347.5 237,337.5
GND on Top Layer "Top Layer-No Net 1" (solid, remove dead copper, pour order 1002): 217.489,305.172 cw(c217.702,305.305) 217.453,305.273 cw(c465.752,336.465) 216.387,357.499 cw(c216.637,357.478) 216.415,357.594 cw(c219.378,357.254) 219.378,360.237 cw(c219.378,359.987) 219.455,360.225 223.124,360.225 cw(c223.124,359.975) 223.186,360.217 ccw(c223.124,366.794) 229.701,366.794 229.701,370.997 cw(c232.706,371.166) 232.007,374.093 cw(c232.157,373.892) 232.113,374.139 cw(c267.051,177.932) 301.407,374.241 cw(c301.15,371.243) 304.16,371.243 cw(c301.15,371.243) 304.155,371.071 cw(c303.91,371.018) 304.16,371.018 304.16,367.87 cw(c303.914,367.825) 304.165,367.825 ccw(c311.811,367.825) 311.681,360.179 cw(c311.811,359.965) 311.811,360.215 314.376,360.215 cw(c314.577,357.257) 317.535,357.467 cw(c317.285,357.45) 317.535,357.45 cw(c317.285,357.45) 317.525,357.377 cw(c68.067,337.469) 318.318,337.469 cw(c68.067,337.469) 316.257,305.421 cw(c316.009,305.453) 316.22,305.318 cw(c309.99,306.015) 310.181,299.749 cw(c310.072,299.975) 310.072,299.724 223.71,299.724 cw(c223.71,299.975) 223.596,299.752 cw(c223.701,306.02)
GND on Bottom Layer "Bottom Layer-No Net" (solid, remove dead copper, pour order 1003): 217.496,305.242 cw(c217.709,305.374) 217.46,305.343 cw(c465.759,336.535) 216.394,357.569 cw(c216.644,357.548) 216.422,357.664 cw(c219.385,357.324) 219.385,360.307 cw(c219.385,360.057) 219.462,360.295 223.13,360.295 cw(c223.13,360.045) 223.193,360.287 ccw(c223.13,366.864) 229.708,366.864 229.708,371.067 cw(c232.713,371.235) 232.014,374.163 cw(c232.164,373.962) 232.12,374.209 cw(c267.058,178.002) 301.414,374.311 cw(c301.157,371.313) 304.167,371.313 cw(c301.157,371.313) 304.162,371.141 cw(c303.917,371.088) 304.167,371.088 304.167,367.94 cw(c303.921,367.895) 304.171,367.895 ccw(c311.818,367.895) 311.688,360.249 cw(c311.818,360.035) 311.818,360.285 314.383,360.285 cw(c314.584,357.327) 317.542,357.537 cw(c317.292,357.52) 317.542,357.52 cw(c317.292,357.52) 317.532,357.447 cw(c68.074,337.539) 318.325,337.539 cw(c68.074,337.539) 316.264,305.491 cw(c316.016,305.523) 316.227,305.388 cw(c309.997,306.085) 310.188,299.819 cw(c310.078,300.045) 310.078,299.794 223.717,299.794 cw(c223.717,300.045) 223.603,299.822 cw(c223.708,306.089)

## Keep-outs
Keep-Out Layer:
  lines w0.5: 216.677,357.505 ccw(c465.792,336.49) 217.742,305.33 ; 216.695,357.502 cw(c219.418,357.279) 219.418,360.012 ; 217.764,305.333 ccw(c223.741,306.045) 223.75,300.026 ; 219.418,360 223.164,360 ; 223.164,359.992 ccw(c223.164,366.82) 229.991,366.82 229.991,371.03 cw(c232.746,371.191) 232.215,373.898 ; 223.75,300 233.025,300 ; 232.196,373.917 cw(c267.091,177.957) 301.415,374.018 cw(c301.19,371.268) 303.94,371.043 ; 233,300 301,300 ; 300.975,300 310.112,300 ; 303.95,367.85 303.95,371.043 ; 303.954,367.85 ccw(c311.851,367.85) 311.851,359.953 ; 310.112,300.023 ccw(c310.03,306.041) 316.026,305.522 ; 311.851,359.99 314.425,359.99 cw(c314.617,357.283) 317.325,357.475 ; 316.049,305.477 ccw(c68.107,337.495) 317.308,357.475

## Silkscreen, mask and mechanical layers (free items; w line width, h text height)
Top Overlay:
  circle w0.254: c239,368 r3.5
  circle w0.254: c295,368 r3.5
  circle w0.254: c287,305 r3.5
  circle w0.254: c247,305 r3.5
Mechanical 1:
  lines w0.1: 216.677,357.505 ccw(c465.792,336.49) 217.742,305.33 ; 216.695,357.502 cw(c219.418,357.279) 219.418,360.012 ; 217.764,305.333 ccw(c223.741,306.045) 223.75,300.026 ; 219.418,360 223.164,360 ; 223.164,359.992 ccw(c223.164,366.82) 229.991,366.82 229.991,371.03 cw(c232.746,371.191) 232.215,373.898 ; 223.75,300 233.025,300 ; 232.196,373.917 cw(c267.091,177.957) 301.415,374.018 cw(c301.19,371.268) 303.94,371.043 ; 233,300 301,300 ; 300.975,300 310.112,300 ; 303.95,367.85 303.95,371.043 ; 303.954,367.85 ccw(c311.851,367.85) 311.851,359.953 ; 310.112,300.023 ccw(c310.03,306.041) 316.026,305.522 ; 311.851,359.99 314.425,359.99 cw(c314.617,357.283) 317.325,357.475 ; 316.049,305.477 ccw(c68.107,337.495) 317.308,357.475 ; 247.234,374.41 ccw(c247.634,374.41) 248.034,374.41 248.034,375.51 ccw(c247.634,375.51) 247.234,375.51 247.234,374.41 ; 247.615,366.79 ccw(c248.015,366.79) 248.415,366.79 248.415,367.89 ccw(c248.015,367.89) 247.615,367.89 247.615,366.79 ; 250.767,368.972 cw(c250.767,369.372) 250.767,369.772 251.867,369.772 cw(c251.867,369.372) 251.867,368.972 250.767,368.972 ; 254.219,366.79 ccw(c254.619,366.79) 255.019,366.79 255.019,367.89 ccw(c254.619,367.89) 254.219,367.89 254.219,366.79 ; 254.6,374.41 ccw(c255,374.41) 255.4,374.41 255.4,375.51 ccw(c255,375.51) 254.6,375.51 254.6,374.41

## Text inside footprints (layer, text, board x,y; h text height)
P2: Top Overlay "2" at 266.718,307.032 h1.27; Top Overlay "1" at 266.718,304.492 h1.27; Top Overlay "9" at 280.434,304.492 h1.27; Top Overlay "10" at 280.434,307.032 h1.27